# EAGLE board Petra-Small (EAGLE 7.7.0)
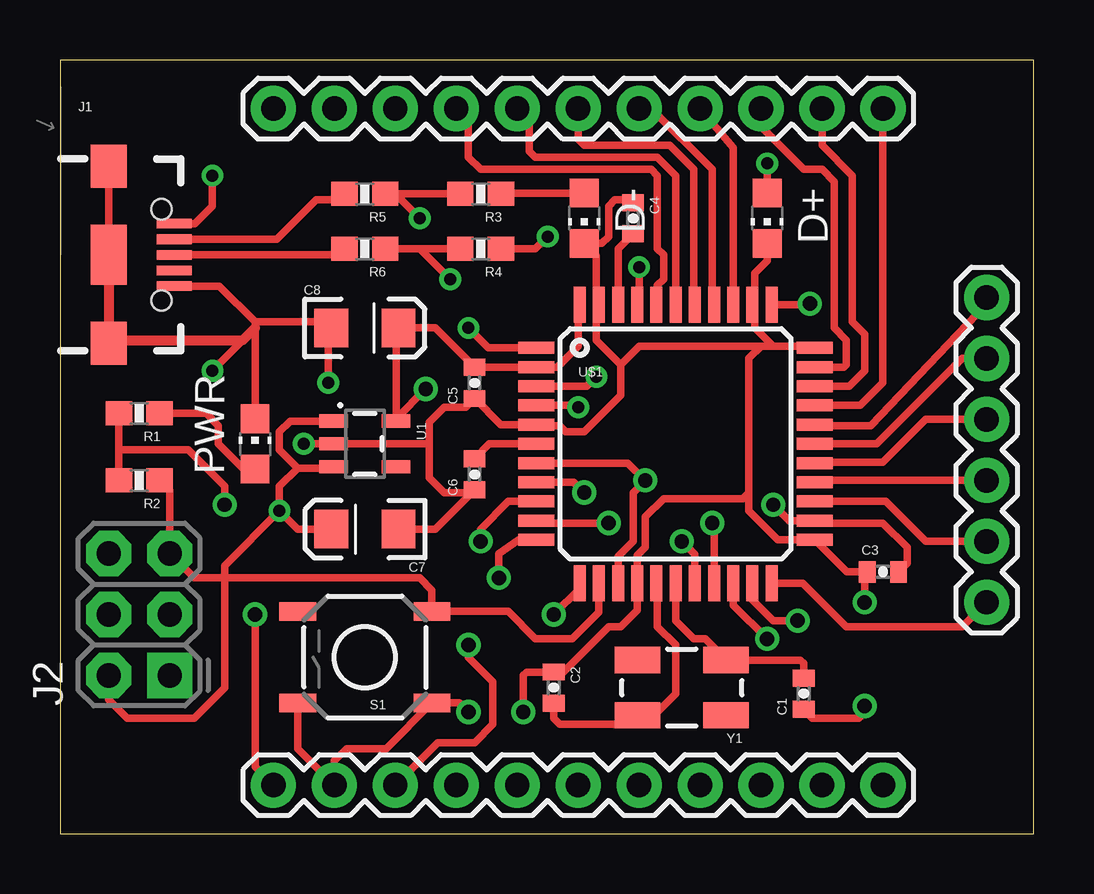
[diagram p0: board, top side]
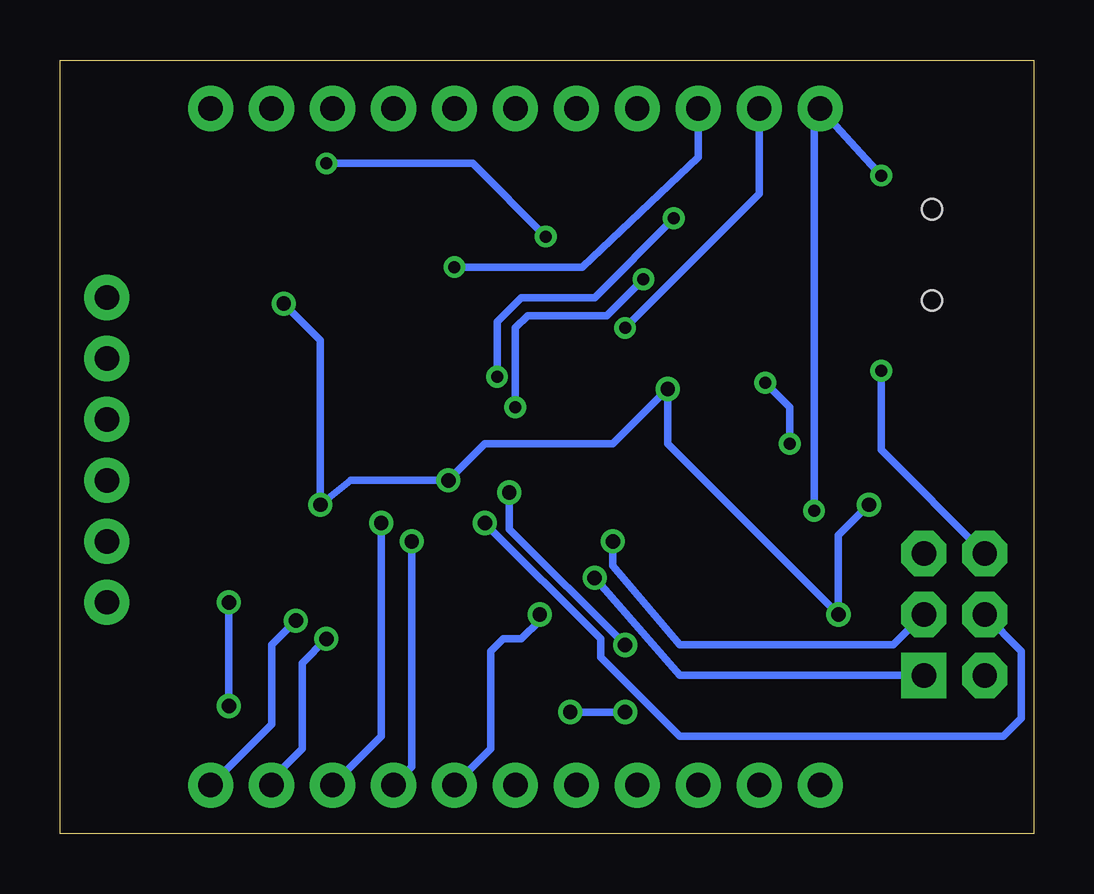
[diagram p1: board, bottom side, seen from below]

Size 40.56 x 32.25 mm. Coordinates in mm from the lower left corner, seen from the top.
Outline: 0,0 40.56,0 40.56,32.25 0,32.25 0,0
Copper layers (1*16): Top 0.035mm / dielectric 1.5mm / Bottom 0.035mm
Design rules "default": minimum track width 10mil, minimum drill 24mil, track to track 8mil, track to pad 8mil, pad to pad 8mil, via to via 8mil, smd to smd 8mil, copper to edge 40mil, drill to drill 8mil, minimum pad ring 10mil, minimum via ring 8mil, stop-mask expansion 4mil, vias tented up to drill 0mil, thermal gap 10mil
Net classes: 0 default: width 0.254 mm, drill 0.356 mm, clearance 0.203 mm

## Footprints (pad centres in the part's own frame; a part is rotated, then mirrored left to right if it is on the bottom)
0402-CAP = smd 0.7 x 0.9: 1 -0.65,0; 2 0.65,0
EIA3216 = smd 1.4 x 1.6: A 1.4,0; C -1.4,0
CHIP-LED0805 = smd 1.2 x 1.2: A 0,-1.05; C 0,1.05
USB-B-MICRO-SMD_V03 = smd 1.45 x 0.4: D+ 2.725,0; D- 2.725,0.65; GND 2.725,-1.3; ID 2.725,-0.65; VBUS 2.725,1.3 | smd 1.5 x 1.8: SHIELD1 0,3.685; SHIELD2 0,-3.685 | smd 1.5 x 2.5: SHIELD3 0,0 | hole 0.85: 2.2,1.9; 2.2,-1.9
2X3-NS = drill 1.016 pad 1.88 square: 1 -2.54,-1.27 | drill 1.016 pad 1.88 octagon: 2 -2.54,1.27; 3 0,-1.27; 4 0,1.27; 5 2.54,-1.27; 6 2.54,1.27
1X06 = drill 1.016 pad 1.88: 1 0,0; 2 2.54,0; 3 5.08,0; 4 7.62,0; 5 10.16,0; 6 12.7,0
1X11 = drill 1.016 pad 1.88: 1 0,0; 2 2.54,0; 3 5.08,0; 4 7.62,0; 5 10.16,0; 6 12.7,0; 7 15.24,0; 8 17.78,0; 9 20.32,0; 10 22.86,0; 11 25.4,0
0603-RES = smd 1.1 x 1: 1 -0.85,0; 2 0.85,0
TACTILE-SWITCH-SMD = smd 1.524 x 0.762: 1 -2.794,1.905; 2 2.794,1.905; 3 -2.794,-1.905; 4 2.794,-1.905
SOT23-5 = smd 0.55 x 1.2: 1 -0.95,-1.3; 2 0,-1.3; 3 0.95,-1.3; 4 0.95,1.3; 5 -0.95,1.3
TQFP44 = smd 1.5 x 0.5: 1 -5.8,4; 2 -5.8,3.2; 3 -5.8,2.4; 4 -5.8,1.6; 5 -5.8,0.8; 6 -5.8,0; 7 -5.8,-0.8; 8 -5.8,-1.6; 9 -5.8,-2.4; 10 -5.8,-3.2; 11 -5.8,-4; 23 5.8,-4; 24 5.8,-3.2; 25 5.8,-2.4; 26 5.8,-1.6; 27 5.8,-0.8; 28 5.8,0; 29 5.8,0.8; 30 5.8,1.6; 31 5.8,2.4; 32 5.8,3.2; 33 5.8,4 | smd 0.5 x 1.5: 12 -4,-5.8; 13 -3.2,-5.8; 14 -2.4,-5.8; 15 -1.6,-5.8; 16 -0.8,-5.8; 17 0,-5.8; 18 0.8,-5.8; 19 1.6,-5.8; 20 2.4,-5.8; 21 3.2,-5.8; 22 4,-5.8; 34 4,5.8; 35 3.2,5.8; 36 2.4,5.8; 37 1.6,5.8; 38 0.8,5.8; 39 0,5.8; 40 -0.8,5.8; 41 -1.6,5.8; 42 -2.4,5.8; 43 -3.2,5.8; 44 -4,5.8
CRYSTAL-SMD-5X3 = smd 1.9 x 1.1: 1 -1.85,-1.15; 2 1.85,-1.15; 3 1.85,1.15; 4 -1.85,1.15

## Placement (x,y rotation side)
C1  22pF  [0402-CAP]  30.99,5.84 90 top
C2  22pF  [0402-CAP]  20.57,6.1 270 top
C3  1uF  [0402-CAP]  34.29,10.92 0 top
C4  0.1uF  [0402-CAP]  23.88,25.65 270 top
C5  1uF  [0402-CAP]  17.27,18.8 90 top
C6  1uF  [0402-CAP]  17.27,14.99 90 top
C7  10uF  [EIA3216]  12.7,12.7 180 top
C8  10uF  [EIA3216]  12.7,21.08 0 top
D+  [CHIP-LED0805]  29.46,25.65 180 top
D-  [CHIP-LED0805]  21.84,25.65 180 top
J1  [USB-B-MICRO-SMD_V03]  2.03,24.13 0 top
J2  AVR_SPI_PRG_6NS  [2X3-NS]  3.3,9.14 90 top
J3  Side  [1X06]  38.61,9.65 90 top
J4  Bottom  [1X11]  8.89,2.03 0 top
J5  Top  [1X11]  8.89,30.23 0 top
PWR  [CHIP-LED0805]  8.13,16.26 0 top
R1  1K  [0603-RES]  3.3,17.53 180 top
R2  10K  [0603-RES]  3.3,14.73 180 top
R3  1K  [0603-RES]  17.53,26.67 180 top
R4  1K  [0603-RES]  17.53,24.38 180 top
R5  22  [0603-RES]  12.7,26.67 180 top
R6  22  [0603-RES]  12.7,24.38 180 top
S1  TAC_SWITCHSMD  [TACTILE-SWITCH-SMD]  12.7,7.37 180 top
U1  MIC5219 5V  [SOT23-5]  12.7,16.26 270 top
U$1  ATMEGA32U4TQFP-44  [TQFP44]  25.65,16.26 0 top
Y1  16MHz  [CRYSTAL-SMD-5X3]  25.91,6.1 180 top

## Library data of the parts
C1-C8 = SparkFun-Passives
D+ D- PWR = led
J1 = SparkFun-Connectors; PROD_ID: CONN-11752
J2 = SparkFun-Connectors
J3-J5 = PartsYouNeed
R1-R6 = SparkFun-Resistors; PROD_ID: RES-00824
S1 = SparkFun-Retired; PROD_ID: SWCH-08247
U1 = SparkFun-PowerIC; PROD_ID: VREG-10107
U$1 = SparkFun-DigitalIC
Y1 = SparkFun-FreqCtrl; PROD_ID: XTAL-08218

## Nets
D+: R4.2 R6.1 U$1.4
D-: R3.2 R5.1 U$1.3
GND: C1.1 C2.1 C3.1 C4.1 C5.1 C6.1 C7.C C8.C D+.C D-.C J1.GND J1.SHIELD1 J1.SHIELD2 J1.SHIELD3 J2.6 J4.2 PWR.C S1.1 S1.2 U1.2 U$1.5 U$1.15 U$1.23 U$1.33 U$1.35 U$1.43
MISO: J2.1 U$1.11
MOSI: J2.4 U$1.10
N$1: C1.2 U$1.17 Y1.1
N$2: C2.2 U$1.16 Y1.3
N$3: C6.2 U$1.6
N$4: C4.2 U$1.42
N$5: J1.D- R5.2
N$6: J1.D+ R6.2
N$7: PWR.A R1.1
N$9: D+.A R4.1
N$11: D-.A R3.1
PB0: J4.3 U$1.8
PB4: J3.5 U$1.28
PB5: J3.6 U$1.29
PB6: J5.11 U$1.30
PB7: J4.7 U$1.12
PC6: J5.10 U$1.31
PC7: J5.9 U$1.32
PD0: J4.8 U$1.18
PD1: J4.9 U$1.19
PD4: J3.2 U$1.25
PD5: J3.1 U$1.22
PD6: J3.3 U$1.26
PD7: J3.4 U$1.27
PE6: J5.2 U$1.1
PF0: J5.3 U$1.41
PF1: J5.4 U$1.40
PF4: J5.5 U$1.39
PF5: J5.6 U$1.38
PF6: J5.7 U$1.37
PF7: J5.8 U$1.36
RST: J2.5 R2.1 S1.3 U$1.13
RX: J4.10 U$1.20
SCK: J2.3 U$1.9
TX: J4.11 U$1.21
VCC: C3.2 C5.2 C8.A J4.1 R1.2 R2.2 U1.5 U$1.2 U$1.7 U$1.14 U$1.24 U$1.34 U$1.44
VIN: C7.A J1.VBUS J2.2 J5.1 U1.1 U1.3

## Tracks (layer width: path | path; a pad name or v marks a point on that pad's centre or on a via)
D+  (via drill 0.5)
  Top 0.305: R6.1 14.99,24.38 | 14.99,24.38 R4.2 | v21.59,17.78 21.41,17.86 U$1.4 | v16.26,23.11 14.99,24.38
  Bottom 0.305: v16.26,23.11 17.78,21.59 21.08,21.59 21.59,21.08 v21.59,17.78
D-  (via drill 0.5)
  Top 0.305: R3.2 14.22,26.67 | 14.22,26.67 R5.1 | U$1.3 21.96,18.66 v22.35,19.05 | v14.99,25.65 14.22,26.42 14.22,26.67
  Bottom 0.305: v22.35,19.05 22.35,21.34 21.34,22.35 18.29,22.35 v14.99,25.65
GND  (via drill 0.5, 0.6)
  Top 0.305: 2.37,20.45 J1.SHIELD2 | J1.SHIELD1 J1.SHIELD3 | D+.C 29.46,23.88 28.96,23.37 28.96,22.16 | 28.96,22.16 U$1.35 | J1.GND 6.63,22.83 8.13,21.34 | 8.13,21.34 8.13,21.08 | 8.13,21.08 PWR.C | v10.16,16.26 U1.2 15.38,16.26 | 8.13,21.34 11.05,21.34 C8.C 11.18,20.96 v11.18,18.8 | 15.38,16.26 15.38,14.84 16,14.22 17.16,14.22 C6.1 15.64,12.7 C7.C | 15.38,16.26 15.38,17.16 16,17.78 16.91,17.78 C5.1 18.36,17.06 U$1.5 19.89,17.02 20.83,17.02 21.08,16.76 21.84,16.76 23.37,18.29 23.37,19.56 | v6.35,19.3 8.13,21.08 | 28.96,22.16 28.96,21.08 29.72,20.32 | 29.72,20.32 31.39,20.32 U$1.33 | C4.1 23.76,26.42 23.11,26.42 22.86,26.16 22.86,24.89 22.57,24.6 D-.C 22.35,24.1 22.35,22.16 U$1.43 22.35,21.95 22.35,20.57 23.37,19.56 | S1.2 9.91,3.56 J4.2 11.43,3.05 11.94,3.56 13.59,3.56 S1.1 16.64,5.46 v17.02,5.08 | v33.53,9.65 33.53,10.81 C3.1 32.79,10.92 U$1.23 29.91,12.26 28.7,13.46 28.7,14.22 | v33.53,5.33 33.53,5.08 33.27,4.83 31.35,4.83 C1.1 | 29.21,20.32 29.72,20.32 | 28.7,14.22 28.7,19.81 29.21,20.32 | v19.3,5.08 19.3,6.6 19.45,6.75 C2.1 20.97,6.75 22.86,8.64 23.37,8.64 24.05,9.32 U$1.15 24.05,11.61 24.38,11.94 24.38,13.21 25.15,13.97 28.45,13.97 28.7,14.22 | 29.21,20.32 24.13,20.32 23.37,19.56
  Top 0.406: J1.SHIELD3 2.03,20.57 | 2.03,20.57 J1.SHIELD2 | 2.03,20.57 7.62,20.57 8.13,21.08
  Bottom 0.305: v10.16,16.26 10.16,17.78 v11.18,18.8 | J2.6 6.35,16 v6.35,19.3 | v33.53,9.65 v33.53,5.33 | v17.02,5.08 v19.3,5.08
MISO  (via drill 0.6)
  Top 0.305: v18.29,10.67 18.29,11.68 19.11,12.26 U$1.11
  Bottom 0.305: J2.1 14.73,6.6 v18.29,10.67
MOSI  (via drill 0.6)
  Top 0.305: v22.86,12.95 19.96,12.95 U$1.10
  Bottom 0.305: J2.4 0.51,7.62 0.51,4.83 1.27,4.06 14.73,4.06 18.03,7.37 18.03,8.13 v22.86,12.95
N$1
  Top 0.305: U$1.17 25.65,8.89 26.42,8.13 26.88,8.13 Y1.1 30.85,7.25 30.99,7.11 C1.2
N$2
  Top 0.305: U$1.16 24.89,10.42 24.89,8.64 25.65,7.87 25.65,5.84 24.76,4.95 Y1.3 23.68,4.57 20.83,4.57 20.57,4.83 C2.2
N$3
  Top 0.305: C6.2 17.89,16.26 U$1.6
N$4
  Top 0.305: U$1.42 23.25,24.38 C4.2
N$5
  Top 0.305: J1.D- 9.03,24.78 10.67,26.42 11.6,26.42 R5.2
N$6
  Top 0.305: J1.D+ 11.6,24.13 R6.2
N$7
  Top 0.305: R1.1 6.1,17.53 6.6,17.02 6.6,16.26 7.65,15.21 PWR.A
N$9  (via drill 0.5)
  Top 0.305: 29.24,26.92 D+.A v29.46,27.94 | R4.1 19.81,24.38 v20.32,24.89
  Bottom 0.305: v29.46,27.94 23.37,27.94 v20.32,24.89
N$11
  Top 0.305: R3.1 18.41,26.7 D-.A
PB0  (via drill 0.6)
  Top 0.305: U$1.8 21.41,14.66 v21.84,14.22 | v17.02,7.87 17.02,7.37 18.03,6.35 18.03,4.57 17.27,3.81 15.75,3.81 J4.3
  Bottom 0.305: v21.84,14.22 21.84,12.7 v17.02,7.87
PB4
  Top 0.305: U$1.28 34.04,16.26 37.59,19.81 J3.5
PB5
  Top 0.305: U$1.29 31.49,17.02 33.78,17.02 38.61,22.1 J3.6
PB6
  Top 0.305: J5.11 34.29,18.8 33.35,17.86 U$1.30
PB7  (via drill 0.6)
  Top 0.305: v20.57,9.14 21.65,10.22 U$1.12
  Bottom 0.305: J4.7 22.61,3.56 22.61,7.62 22.1,8.13 21.34,8.13 20.57,8.89 v20.57,9.14
PC6
  Top 0.305: J5.10 31.75,28.7 33.02,27.43 33.02,21.34 33.53,20.83 33.53,19.3 32.88,18.66 U$1.31
PC7
  Top 0.305: J5.9 29.21,29.46 30.99,27.69 31.75,27.69 32.26,27.18 32.26,21.08 32.77,20.57 32.77,19.56 32.66,19.46 U$1.32
PD0  (via drill 0.6)
  Top 0.305: U$1.18 26.45,11.65 v25.91,12.19
  Bottom 0.305: v25.91,12.19 25.91,2.79 J4.8
PD1  (via drill 0.6)
  Top 0.305: U$1.19 27.25,12.88 v27.18,12.95
  Bottom 0.305: v27.18,12.95 27.18,4.06 J4.9
PD4
  Top 0.305: U$1.25 34.4,13.86 36.07,12.19 J3.2
PD5
  Top 0.305: U$1.22 30.95,10.46 32.77,8.64 37.59,8.64 J3.1
PD6
  Top 0.305: U$1.26 31.53,14.73 J3.3
PD7
  Top 0.305: U$1.27 31.49,15.49 34.29,15.49 36.07,17.27 J3.4
PE6  (via drill 0.5)
  Top 0.305: U$1.1 17.84,20.26 v17.02,21.08
  Bottom 0.305: v17.02,21.08 11.43,26.67 J5.2
PF0  (via drill 0.5)
  Top 0.305: U$1.41 24.13,22.13 v24.13,23.62
  Bottom 0.305: v24.13,23.62 18.8,23.62 13.97,28.19 J5.3
PF1
  Top 0.305: U$1.40 24.89,22.09 24.89,22.86 25.15,23.11 25.15,24.13 24.89,24.38 24.89,27.43 24.64,27.69 17.53,27.69 17.02,28.19 17.02,29.72 J5.4
PF4
  Top 0.305: U$1.39 25.65,27.43 24.89,28.19 19.81,28.19 19.56,28.45 19.56,29.72 J5.5
PF5
  Top 0.305: J5.6 21.59,28.96 21.84,28.7 25.4,28.7 26.42,27.69 26.42,22.09 U$1.38
PF6
  Top 0.305: U$1.37 27.18,22.13 27.18,27.69 24.64,30.23 J5.7
PF7
  Top 0.305: J5.8 28.05,28.59 U$1.36
RST
  Top 0.305: R2.1 4.57,14.31 J2.5 5.59,10.67 14.99,10.67 15.49,10.16 S1.3 18.67,9.27 19.81,8.13 21.34,8.13 22.45,9.25 U$1.13
RX  (via drill 0.6)
  Top 0.305: U$1.20 28.05,9.54 v29.46,8.13
  Bottom 0.305: v29.46,8.13 30.48,7.11 30.48,3.56 31.75,2.29 J4.10
SCK  (via drill 0.6)
  Top 0.305: v17.53,12.19 17.53,12.7 18.68,13.86 U$1.9
  Bottom 0.305: J2.3 5.84,7.87 14.73,7.87 17.53,11.18 v17.53,12.19
TX  (via drill 0.6)
  Top 0.305: U$1.21 28.85,9.75 29.72,8.89 v30.73,8.89
  Bottom 0.305: v30.73,8.89 31.75,7.87 31.75,4.57 J4.11
VCC  (via drill 0.6)
  Top 0.305: 17.28,19.46 U$1.2 20.73,19.46 21.59,20.32 21.59,21.99 U$1.44 | C5.2 15.64,21.08 C8.A 14,20.98 U1.5 14,17.3 v15.24,18.54 | R1.2 2.45,16 | 2.45,16 R2.2 | C3.2 35.31,11.29 35.31,11.94 34.29,12.95 31.5,12.95 31.5,13.01 U$1.24 30.38,13.06 v29.72,13.72 | J4.1 8.13,2.79 v8.13,9.14 | v6.86,13.72 6.86,14.48 5.33,16 2.45,16 | v31.24,22.1 31.2,22.06 U$1.34 | U$1.14 23.25,11.57 23.88,12.19 23.88,14.22 v24.38,14.73 23.66,15.46 U$1.7
  Top 0.406: C5.2 17.28,19.46
  Bottom 0.305: v6.86,13.72 8.13,12.45 v8.13,9.14 15.24,16.26 v15.24,18.54 17.53,16.26 22.86,16.26 v24.38,14.73 28.45,14.73 v29.72,13.72 29.72,20.57 v31.24,22.1
VIN  (via drill 0.5)
  Top 0.305: J1.VBUS 5.62,25.43 6.35,26.16 v6.35,27.43 | U1.1 9.59,17.21 9.14,16.76 9.14,16 9.91,15.24 | 9.91,15.24 11.33,15.24 U1.3 | v9.14,13.46 9.91,12.7 C7.A | v9.14,13.46 9.14,14.48 9.91,15.24 | J2.2 2.03,5.59 2.79,4.83 5.59,4.83 6.86,6.1 6.86,11.18 v9.14,13.46
  Bottom 0.305: v6.35,27.43 J5.1 9.14,29.97 v9.14,13.46